# Altium PCB METR4810_PCB_C_Layout.PcbDoc
Units mil, origin at the board's own origin, x right, y up, seen from the top; angles counter-clockwise.
Board outline 2362.2 x 2165.35 mil, 2 copper layers (Top Layer, Bottom Layer); 37 components, 36 nets, 151 pads, 12 vias.
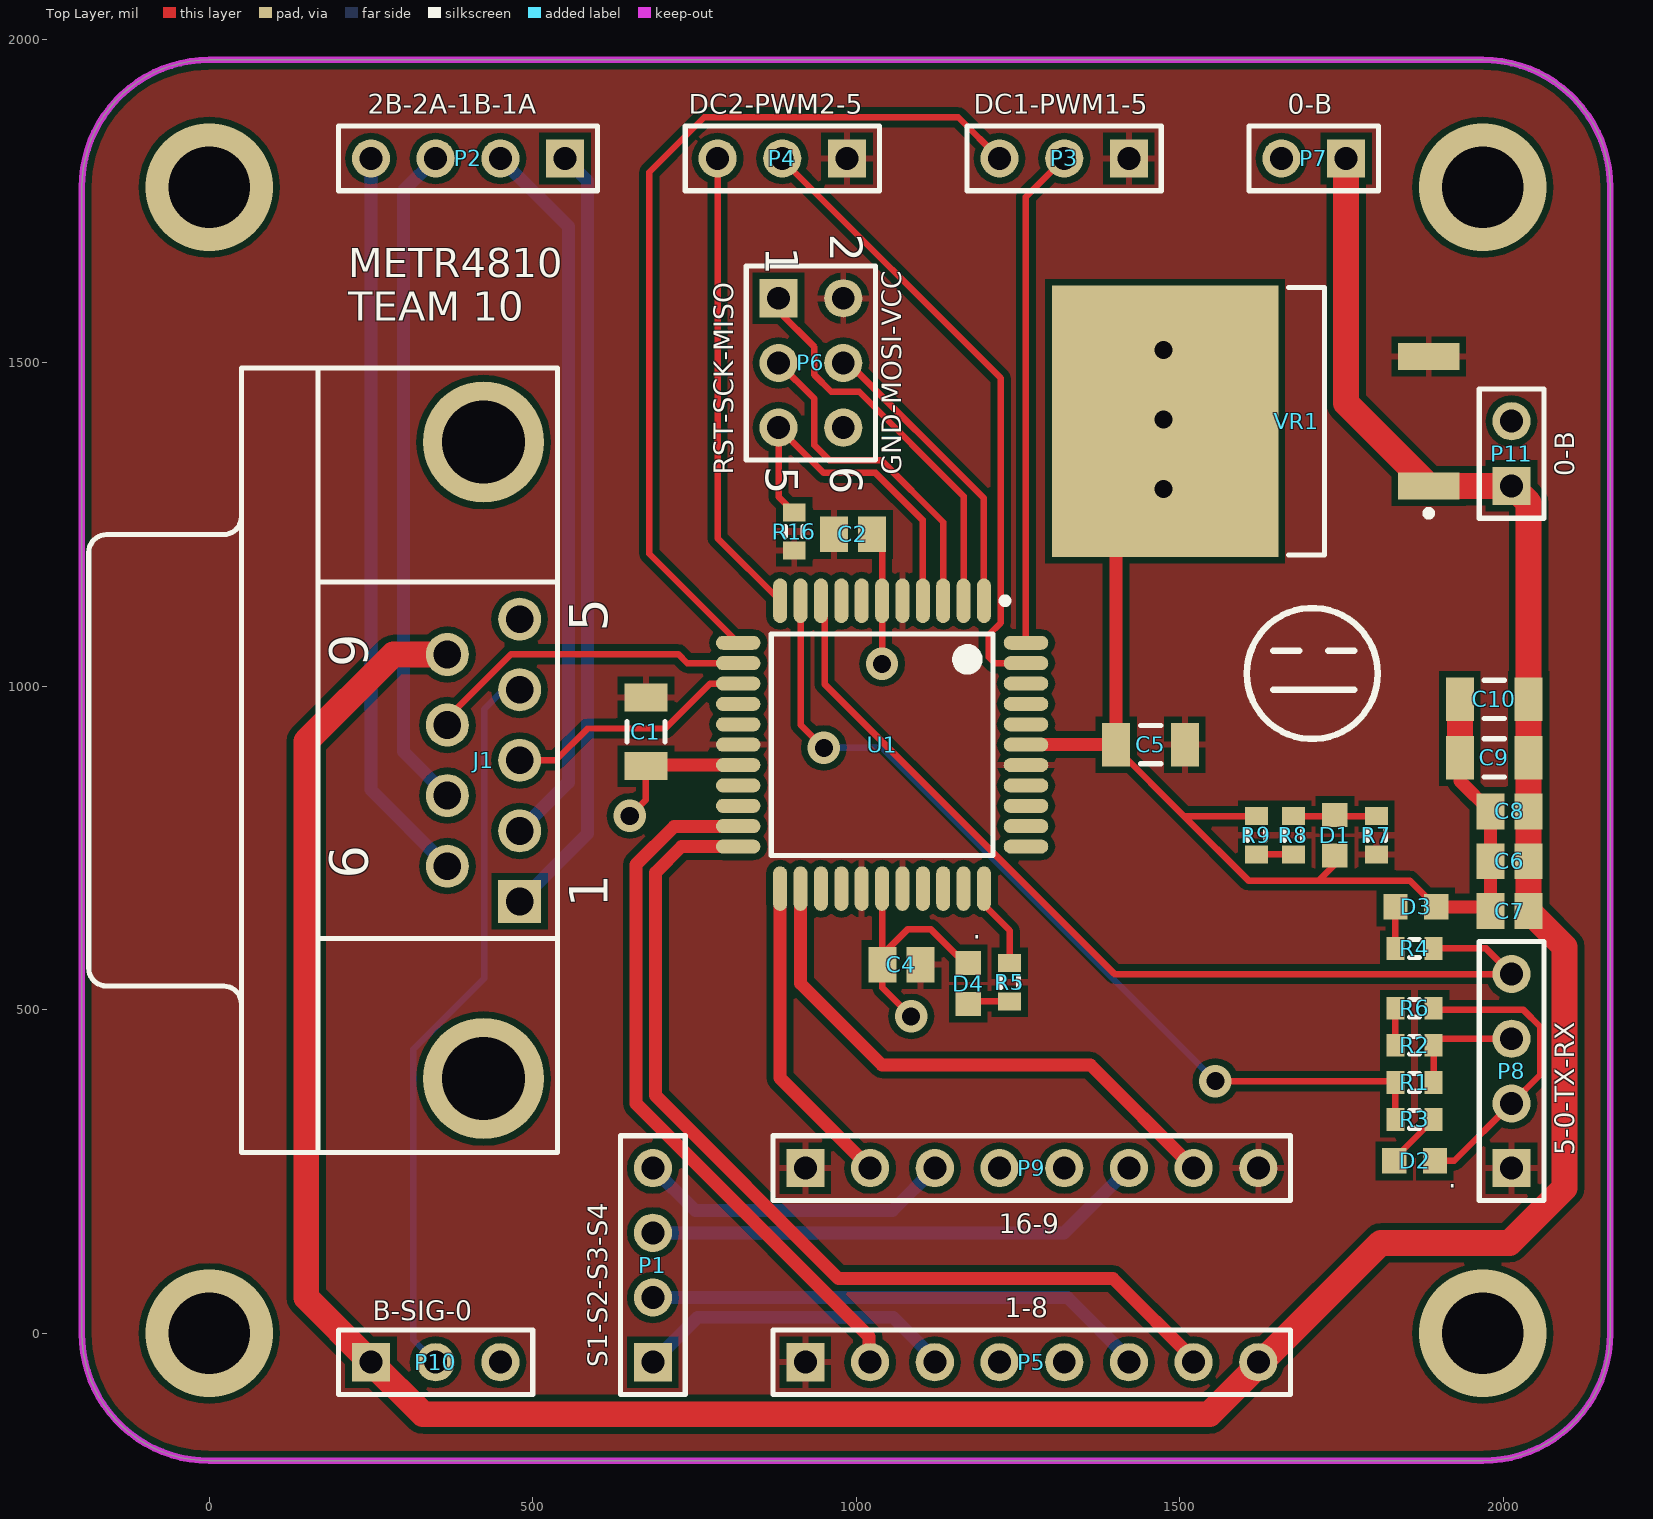
[diagram p0: Top Layer view]
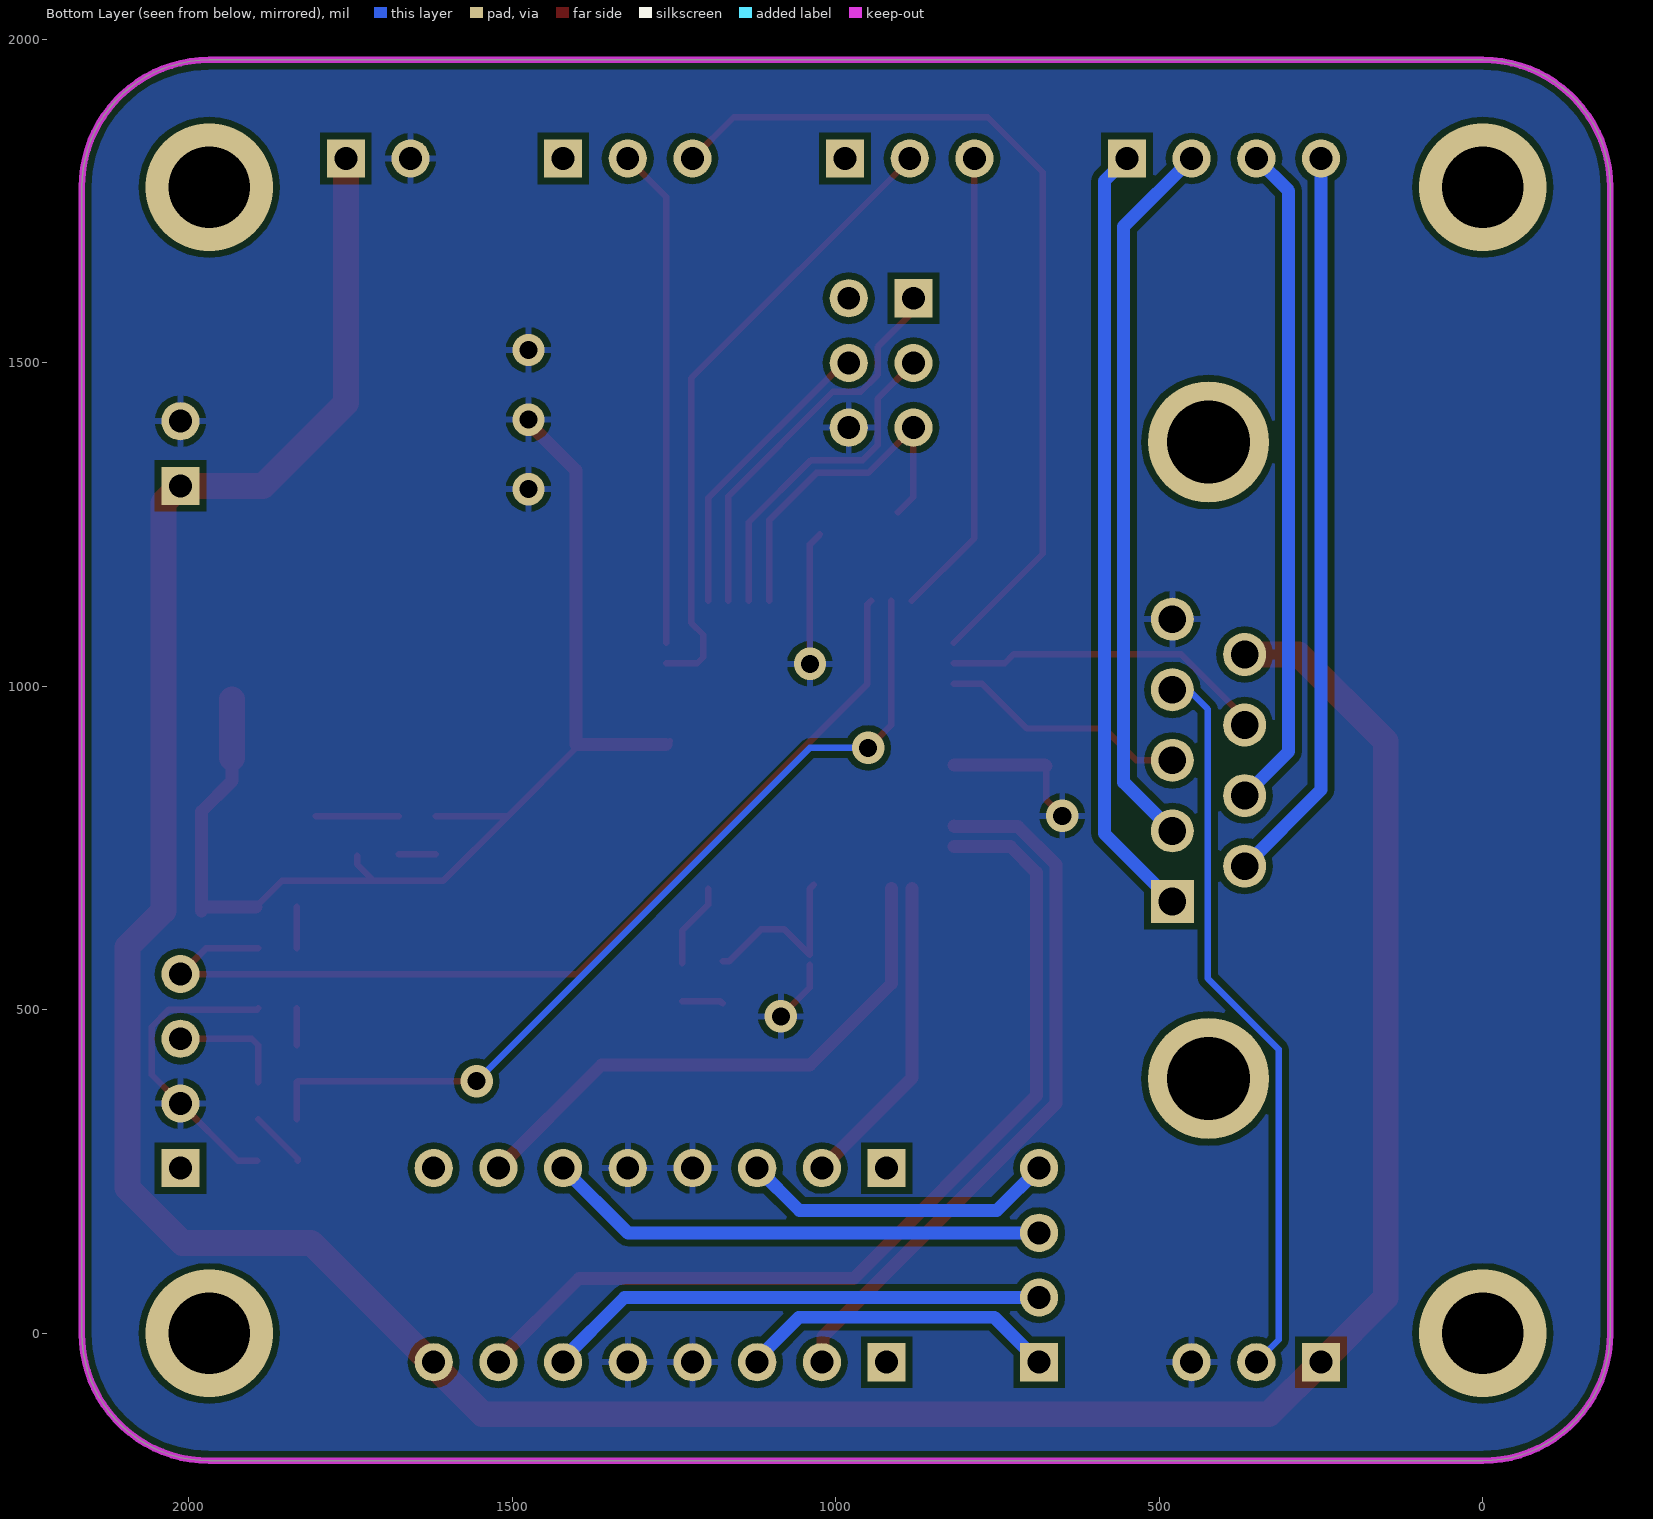
[diagram p1: Bottom Layer view, seen from below]

## Layer stack, top to bottom
Top Solder: solder mask 0.4, Solder Resist, Dk 3.5
Top Layer: signal copper 1.4
Dielectric 1: dielectric 12.6, FR-4, Dk 4.8
Bottom Layer: signal copper 1.4
Bottom Solder: solder mask 0.4, Solder Resist, Dk 3.5

## Board outline
-196.85,0 -196.85,1771.65 cw(c0,1771.65) 0,1968.5 1968.5,1968.5 cw(c1968.5,1771.65) 2165.35,1771.65 2165.35,0 cw(c1968.5,0) 1968.5,-196.85 0,-196.85 cw(c0,0)

## Design rules (kind name [scope] priority, off if disabled: settings)
Clearance [All] p1: gap=10
PolygonConnect [All] p1: connectstyle=Relief reliefconductorwidth=10 reliefentries=4 polygonreliefangle="90 Angle" airgapwidth=10
RoomDefinition METR4810_Schematic [InComponentClass('METR4810_Schematic')] p1: confinementstyle=ConfineIn formatcopy=TRUE lockcomponents=FALSE outline -215,-210 2185,-210 2185,2005 -215,2005
RoutingVias [All] p1: holewidth=28 width=50 viastyle="Through Hole" minholewidth=28 minwidth=50 maxholewidth=28 maxwidth=50
SolderMaskExpansion [All] p1: expansion=4
Width [All] p1: maxlimit=40 minlimit=10 preferedwidth=10
30 further rules are at their usual default settings.

## Components (designator, comment, footprint, x,y, rotation, side; value= is the part's Value field where it differs from the comment)
C1 "Cap Semi" C1206 675,930 r90 top
C2 "Cap Pol3" C0805 995,1235 r0 top
C4 "Cap Pol3" C0805 1070,570 r180 top
C5 "Cap Semi" C1206 1455,910 r0 top
C6 "Cap Pol3" C0805 2009.84,729.86 r180 top
C7 "Cap Pol3" C0805 2009.84,652.92 r180 top
C8 "Cap Pol3" C0805 2009.84,806.8 r180 top
C9 "Cap Semi" C1206 1986.22,889.65 r0 top
C10 "Cap Semi" C1206 1986.22,980 r0 top
D1 "LED1" L0603 1740,770 r270 top
D2 "LED1" L0603 1863.03,266.75 r0 top
D3 "LED1" L0603 1865,659.14 r0 top
D4 "LED1" L0603 1173.15,540.83 r90 top
J1 "D Connector 9" DSUB1.385-2H9 49.97,885.83 r90 top
P1 "Header 4" HDR1X4 685.77,-44.49 r90 top
P2 "Header 4" HDR1X4 550,1816.14 r180 top
P3 "Header 3" HDR1X3 1421.54,1816.14 r180 top
P4 "Header 3" HDR1X3 985.77,1816.14 r180 top
P5 "Header 8" HDR1X8 921.54,-44.49 r0 top
P6 "Header 3X2" HDR2X3 880,1600 r270 top
P7 "Header 2" HDR1X2 1757.3,1816.14 r180 top
P8 "Header 4" HDR1X4 2012.99,255.51 r90 top
P9 "Header 8" HDR1X8 921.54,255.51 r0 top
P10 "Header 3" HDR1X3 250,-44.49 r0 top
P11 "Header 2" HDR1X2 2012.99,1310 r90 top
R1 "Res3" J1-0603 1863.03,388.15 r0 top
R2 "Res3" J1-0603 1863.03,445.4 r180 top
R3 "Res3" J1-0603 1863.03,330.9 r180 top
R4 "Res3" J1-0603 1863.03,595 r0 top
R5 "Res3" J1-0603 1237.29,542.8 r90 top
R6 "Res3" J1-0603 1863.03,502.66 r0 top
R7 "Res3" J1-0603 1804.14,770 r90 top
R8 "Res3" J1-0603 1675.86,770 r270 top
R9 "Res3" J1-0603 1618.6,770 r90 top
R16 "Res3" J1-0603 904.28,1239.45 r270 top
U1 "ATmega324PA-AU" 44A_N 1040,910 r270 top
VR1 "Volt Reg" D2PAK_N 1617.28,1410 r180 top

## Footprints (in the part's own frame and the unit in brackets; to place one, negate y for a bottom-side part, rotate by r counter-clockwise, add the part's x,y. Pads: shape width x height; smd on the part's side, far side on the other; paste and mask are expansions set on the pad)
44A_N [mm] "Thin QFP, 44-Leads, Body 10x10mm, Pitch 0.8mm, IPC Medium Density"
  oval 1.75x0.55 smd: 1(-5.65,4) 2(-5.65,3.2) 3(-5.65,2.4) 4(-5.65,1.6) 5(-5.65,0.8) 6(-5.65,0) 7(-5.65,-0.8) 8(-5.65,-1.6) 9(-5.65,-2.4) 10(-5.65,-3.2) 11(-5.65,-4) 23(5.65,-4) 24(5.65,-3.2) 25(5.65,-2.4) 26(5.65,-1.6) 27(5.65,-0.8) 28(5.65,0) 29(5.65,0.8) 30(5.65,1.6) 31(5.65,2.4) 32(5.65,3.2) 33(5.65,4)
  oval 0.55x1.75 smd: 12(-4,-5.65) 13(-3.2,-5.65) 14(-2.4,-5.65) 15(-1.6,-5.65) 16(-0.8,-5.65) 17(0,-5.65) 18(0.8,-5.65) 19(1.6,-5.65) 20(2.4,-5.65) 21(3.2,-5.65) 22(4,-5.65) 34(4,5.65) 35(3.2,5.65) 36(2.4,5.65) 37(1.6,5.65) 38(0.8,5.65) 39(0,5.65) 40(-0.8,5.65) 41(-1.6,5.65) 42(-2.4,5.65) 43(-3.2,5.65) 44(-4,5.65)
  silkscreen extent -5.77,-4.35 4.35,4.95, body extent -5,-5 5,5, height 1.2
C0805 [mm] "Chip Capacitor, Body 2.0x1.3mm, IPC High Density"
  rect 1.1x1.4 smd: 1(-0.75,0) 2(0.75,0)
  body extent -1.1,-0.72 1.1,0.72, height 1.4
C1206 [mm] "Chip Capacitor, Body 3.2x1.6mm, IPC High Density"
  rect 1.1x1.7 smd: 1(-1.35,0) 2(1.35,0)
  silkscreen extent -0.4,-0.75 0.4,0.75, body extent -1.7,-0.9 1.7,0.9, height 1.3
D2PAK_N [mm] "D2-PAK, 4-Leads, Body 8.8x10.4mm, Pitch 2.54mm, Lead Span 15.1mm, IPC Medium Density"
  rect 2.4x1.05 smd: 1(-6.8,2.54) 3(-6.8,-2.54)
  rect 8.9x10.65 smd: 2(3.55,0)
  silkscreen extent -6.93,-5.25 -1.3,5.25, body extent -2.7,-5.28 6.3,5.28, height 4.69
DSUB1.385-2H9 [mm] "Connector; D Subminiature; 9 Position; Right Angle; Pitch 1.385 mm"
  rect 1.69x1.69 hole 1.09: 1(-5.54,-10.92)
  round 1.69 hole 1.09: 2(-2.77,-10.92) 3(0,-10.92) 4(2.77,-10.92) 5(5.54,-10.92) 6(-4.155,-8.08) 7(-1.385,-8.08) 8(1.385,-8.08) 9(4.155,-8.08)
  round 4.76 hole 3.26: 10(-12.495,-9.5) 11(12.495,-9.5)
  silkscreen extent -15.4,-12.4 15.4,6
HDR1X2 [mm] "Connector; Header; 2 Position"
  rect 1.5x1.5 hole 0.9: 1(0,0)
  round 1.5 hole 0.9: 2(2.54,0)
  silkscreen extent -1.27,-1.27 3.81,1.27
HDR1X3 [mm] "Connector; Header; 3 Position"
  rect 1.5x1.5 hole 0.9: 1(0,0)
  round 1.5 hole 0.9: 2(2.54,0) 3(5.08,0)
  silkscreen extent -1.27,-1.27 6.35,1.27
HDR1X4 [mm] "Connector; Header; 4 Position"
  rect 1.5x1.5 hole 0.9: 1(0,0)
  round 1.5 hole 0.9: 2(2.54,0) 3(5.08,0) 4(7.62,0)
  silkscreen extent -1.27,-1.27 8.89,1.27
HDR1X8 [mm] "Connector; Header; 8 Position"
  rect 1.5x1.5 hole 0.9: 1(0,0)
  round 1.5 hole 0.9: 2(2.54,0) 3(5.08,0) 4(7.62,0) 5(10.16,0) 6(12.7,0) 7(15.24,0) 8(17.78,0)
  silkscreen extent -1.27,-1.27 19.05,1.27
HDR2X3 [mm] "Connector; Header; 3x2 Position"
  rect 1.5x1.5 hole 0.9: 1(0,0)
  round 1.5 hole 0.9: 2(0,2.54) 3(2.54,0) 4(2.54,2.54) 5(5.08,0) 6(5.08,2.54)
  silkscreen extent -1.27,-1.27 6.35,3.81
J1-0603 [mm] "Chip Resistor, Body 1.6x0.8mm, IPC High Density"
  rect 0.7x0.9 smd: 1(-0.75,0) 2(0.75,0)
  silkscreen extent -0.2,-0.35 0.2,0.35, body extent -0.85,-0.48 0.85,0.48, height 0.9
L0603 [mm]
  rect 0.95x1 smd: 1(-0.8,0) 2(0.8,0)

## Part data
C1 C5 C9 C10: "Capacitor (Semiconductor SIM Model)"
C2 C4 C6 C7 C8: "Polarized Capacitor (Surface Mount)"
D1 D2 D3 D4: "Typical RED GaAs LED"
J1: "Receptacle Assembly, 9 Position, Right Angle"
P1 P2 P8: "Header, 4-Pin"
P3 P4 P10: "Header, 3-Pin"
P5 P9: "Header, 8-Pin"
P6: "Header, 3-Pin, Dual row"
P7 P11: "Header, 2-Pin"
R1 R2 R3 R4 R5 R6 R7 R8 R9 R16: "Resistor"
U1: "8-bit AVR Microcontroller, 32KB Flash, 1KB EEPROM, 2KB SRAM, 44-pin TQFP, Industrial Grade (-40°C to 85°C)"
VR1: "Voltage Regulator"

## Via types
v1: diameter 50, hole 28, Top Layer to Bottom Layer, 8 vias
v2: diameter 196.85, hole 125.98, Top Layer to Bottom Layer, 4 vias

## Nets (pads, with @x,y where several pads share a name; then routed paths per layer and width w, separated by ;. In a path a pad name is that pad's centre, name@x,y a point inside that pad or via, vN(x,y) a via of type N, cw(c..) or ccw(c..) an arc to the next point about the centre after c; other vN are vias at no path point)
BAT: C6.1 C7.1 C8.1 C9.2 C10.2 J1.9 P5.8 P7.1 P10.1 P11.1 VR1.1 | length 5104
  Top Layer w40: J1.9 284.41,1049.41 150,915 150,55.51 P10.1 330.51,-125 1546.02,-125 1811.02,140 2010,140 2095,225 2095,597.29 C7.1 C6.1 C8.1 C9.2 C10.2 2039.37,1283.62 P11.1 VR1.1 1757.3,1437.7 P7.1
CAM_SIG: J1.4 P10.2 | length 1136.6
  Bottom Layer w10: P10.2 315.29,-9.77 315.29,438.92 425,548.64 425,965 454.88,994.88 J1.4
"DC 1 ENABLE": P3.3 U1.12 | length 1387.7
  Top Layer w10: U1.12 680,1205.04 680,1795 765,1880 1157.68,1880 P3.3
"DC 2 ENABLE": P4.3 U1.11 | length 723.8
  Top Layer w10: P4.3 785.77,1229.19 U1.11
GND: C1.1 C2.2 C4.2 C5.1 C6.2 C7.2 C8.2 C9.1 C10.1 D1.2 D2.2 D3.2 D4.2 J1.5 P5.4 P5.5 P6.6 P7.2 P8.2 P9.4 P9.5 P10.3 P11.2 R6.2 R9.2 U1.6 U1.18 U1.28 U1.39 VR1.2 | length 3161.3
  Top Layer w10: v1(650,800) 675,825 C1.1 ; C2.2 1040,1219.53 U1.6 v1(1040,1035) ; U1.28@1034.33,693.23 U1.28 1040,585 1079.98,624.98 1114.98,624.98 1164.95,575 D4.2@1175,575 ; C4.2 1040.47,534.53 v1(1085,490) ; U1.39@1256.77,915.67 U1.39 ; C5.1 1401.85,904.51 1506.84,799.53 ; R9.2 1506.84,799.53 ; D1.2 1740,725 1715,700 ; R6.2 1895.18,500.04 2031.44,500.04 2057.52,473.96 2057.52,400.04 P8.2 1924.23,266.75 D2.2 ; D3.2 1855.64,700 1715,700 ; 1506.84,799.53 1606.37,700 1715,700
  Top Layer w20: C1.1 676.65,878.5 U1.18 ; U1.39 C5.1 1401.85,1334.33 VR1.2 ; D3.2 1974.09,659.14 C7.2 C6.2 C8.2 1933.07,854.05 C9.1
  Top Layer w40: C9.1 C10.1
  other v1: 1475,1305 1475,1412.5 1475,1520
MISO: P6.1 U1.2 | length 611.2
  Top Layer w10: P6.1 880,1580 935.47,1524.53 935.47,1481.56 961.56,1455.47 1004.53,1455.47 1165.98,1294.02 U1.2
MOSI: P6.4 U1.1 | length 462.5
  Top Layer w10: P6.4 988.28,1500 1197.48,1290.8 U1.1
MOTOR_1A: J1.2 P2.2 | length 1114
  Bottom Layer w20: P2.2 555,1711.14 555,851.88 J1.2
MOTOR_1B: J1.1 P2.1 | length 1206.5
  Bottom Layer w20: J1.1 585,772.82 585,1781.14 P2.1
MOTOR_2A: J1.6 P2.4 | length 1142.8
  Bottom Layer w20: P2.4 250,840.33 J1.6
MOTOR_2B: J1.7 P2.3 | length 1033.8
  Bottom Layer w20: P2.3 300,1766.14 300,899.38 J1.7
NetD2_1: D2.1 R3.1 | length 89.4
  Top Layer w10: D2.1 1831.54,269.87 R3.1
NetD3_1: D3.1 R4.1 | length 64.1
  Top Layer w10: R4.1 D3.1
NetD4_1: D4.1 R5.1 | length 63.6
  Top Layer w10: D4.1@1175,510 1178.27,513.27 R5.1
NetR2_2: R2.2 R6.1 | length 57.3
  Top Layer w10: R2.2 R6.1
NetR8_2: R8.2 R9.1 | length 57.3
  Top Layer w10: R9.1 R8.2
POWER: D1.1 R7.2 R8.1 | length 128.3
  Top Layer w10: R8.1 R7.2
"PWM DC 1": P3.2 U1.44 | length 773.1
  Top Layer w10: U1.44 1262.44,1757.05 P3.2
"PWM DC 2": P4.2 U1.43 | length 979.7
  Top Layer w10: P4.2 885.77,1814.23 1223.31,1476.69 1223.31,1098.12 1205,1079.81 1205,1045 1214.02,1035.98 U1.43
"PWM SV 1": J1.3 U1.14 | length 386.8
  Top Layer w10: J1.3 535.83,885.83 585,935 705,935 774.49,1004.49 U1.14
"PWM SV 2": J1.8 U1.13 | length 507.1
  Top Layer w10: J1.8 368.08,951.33 466.75,1050 725,1050 739.02,1035.98 U1.13
RESET: P6.5 R16.1 U1.4 | length 548.1
  Top Layer w10: R16.1 880,1293.26 P6.5 950,1330 1030,1330 1102.56,1257.44 1102.56,1132.44 U1.4
RXD: P8.4 R4.2 U1.9 | length 1515.4
  Top Layer w10: U1.9 951.18,1126.77 951.18,1003.63 1399.3,555.51 P8.4 1973.5,595 R4.2
S-IN1: P5.2 U1.21 | length 1103.3
  Top Layer w20: U1.21 816.89,783.35 718.35,783.35 660,725 660,355 1020,-5 1020,-37.95 P5.2@1026.54,-44.49
S-IN2: P5.7 U1.22 | length 1496.4
  Top Layer w20: U1.22 729.95,752.52 690,712.57 690,367.43 972.43,85 1397.05,85 P5.7@1526.54,-44.49
S-IN3: P9.2 U1.23 | length 489.6
  Top Layer w20: U1.23 882.52,394.53 P9.2
S-IN4: P9.7 U1.24 | length 872.3
  Top Layer w20: U1.24 914.02,540.98 1040,415 1362.05,415 P9.7
S-OUT1: P1.1 P5.3 | length 498.3
  Bottom Layer w20: P1.1 755.26,25 1057.05,25 P5.3@1126.54,-44.49
S-OUT2: P1.2 P5.6 | length 782.2
  Bottom Layer w20: P1.2 1326.54,55.51 P5.6@1426.54,-44.49
S-OUT3: P1.4 P9.3 | length 490
  Bottom Layer w20: P1.4 751.28,190 1056.02,190 P9.3
S-OUT4: P1.3 P9.6 | length 777.2
  Bottom Layer w20: P1.3 1321.54,155.51 P9.6
SCK: P6.3 U1.3 | length 519.8
  Top Layer w10: P6.3 935.47,1444.53 935.47,1372.81 958.28,1350 1038.28,1350 1134.49,1253.8 U1.3
STATUS: R5.2 U1.33 | length 131.7
  Top Layer w10: U1.33 1197.48,662.52 1237.29,622.71 R5.2
TXD: R1.1 R3.2 U1.10 | length 1397.2
  Top Layer w10: U1.10 914.02,940.98 v1(950,905) ; v1(1555.19,390) 1831.65,390 R1.1 R3.2
  Bottom Layer w10: v1(950,905) 1040.19,905 v1(1555.19,390)
TXD_3.3V: P8.3 R1.2 R2.1 | length 181.9
  Top Layer w10: R1.2 R2.1 1902.67,455.51 P8.3
VCC: C1.2 C2.1 C4.1 C5.2 P3.1 P4.1 P5.1 P6.2 P8.1 P9.1 P9.8 R7.1 R16.2 U1.5 U1.17 U1.27 U1.29 U1.38 VR1.3
pads on no net: J1.10 J1.11 U1.7 U1.8 U1.15 U1.16 U1.19 U1.20 U1.25 U1.26 U1.30 U1.31 U1.32 U1.34 U1.35 U1.36 U1.37 U1.40 U1.41 U1.42
copper on no net:
  other v2: 0,0 1968.5,0 0,1771.65 1968.5,1771.65

## Polygon pours and split planes (outlines as drawn)
VCC on Top Layer "VCC_L01_P000" (solid, remove dead copper, pour order 0): -196.85,0 -196.85,1771.65 cw(c0,1771.65) 0,1968.5 1968.5,1968.5 cw(c1968.5,1771.65) 2165.35,1771.65 2165.35,0 cw(c1968.5,0) 1968.5,-196.85 0,-196.85 cw(c0,0)
GND on Bottom Layer "GND_L02_P001" (solid, remove dead copper, pour order 1): -196.85,0 -196.85,1771.65 cw(c0,1771.65) 0,1968.5 1968.5,1968.5 cw(c1968.5,1771.65) 2165.35,1771.65 2165.35,0 cw(c1968.5,0) 1968.5,-196.85 0,-196.85 cw(c0,0)

## Keep-outs
Keep-Out Layer:
  the board outline again, w10

## Silkscreen, mask and mechanical layers (free items; w line width, h text height)
Top Overlay:
  circle w10: c1705,1020 r101.24
  lines w10: 1645,995 1770,995 ; 1645,1055 1685,1055 ; 1730,1055 1770,1055
  text "2B-2A-1B-1A" at 245.05,1885 h30
  text "DC2-PWM2-5" at 740.81,1885 h30
  text "DC1-PWM1-5" at 1181.58,1885 h30
  text "0-B" at 1667.32,1885 h30
  text "METR4810 / TEAM 10" at 215,1565 h45
  text "RST-SCK-MISO" at 810,1327.56 h30 r90
  text "GND-MOSI-VCC" at 1070,1327.56 h30 r90
  text "0-B" at 2110,1325 h30 r90
  text "." at 1180,610 h30
  text "5-0-TX-RX" at 2110,275.55 h30 r90
  text "." at 1915,225 h30
  text "16-9" at 1220,155 h30
  text "1-8" at 1230,25 h30
  text "B-SIG-0" at 252.53,20 h30
  text "S1-S2-S3-S4" at 615,-51.94 h30 r90

## Text inside footprints (layer, text, board x,y; h text height)
J1: Top Overlay "1" at 615.92,657.87 h59.06 r90; Top Overlay "5" at 615.92,1084.25 h59.06 r90; Top Overlay "9" at 245.84,1029.72 h59.06 r90; Top Overlay "6" at 245.84,702.56 h59.06 r90
P6: Top Overlay "6" at 960,1340 h50 r270; Top Overlay "5" at 860,1340 h50 r270; Top Overlay "2" at 960,1700 h50 r270; Top Overlay "1" at 860,1680 h50 r270